# Altium PCB dv_spectrum_row.PcbDoc
Units mil, origin at the board's own origin, x right, y up, seen from the top; angles counter-clockwise.
Board outline 24840 x 787.4 mil, 2 copper layers (Top Layer, Bottom Layer); 43 components, 47 nets, 266 pads, 42 vias.
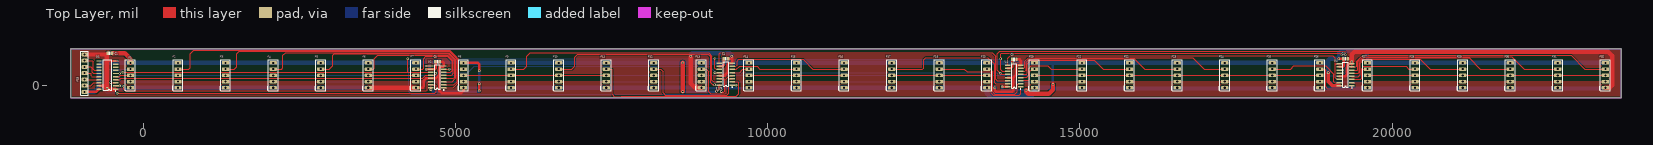
[diagram p0: Top Layer view]
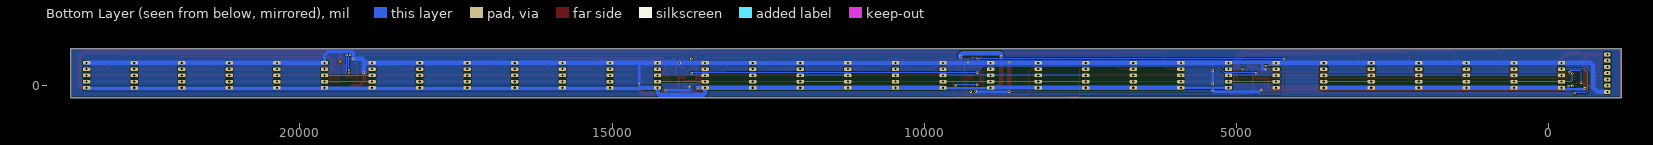
[diagram p1: Bottom Layer view, seen from below]

## Layer stack, top to bottom
Top Layer: signal copper 1.4
Dielectric: dielectric 12.6, FR-4, Dk 4.8
Bottom Layer: signal copper 1.4

## Board outline
-1165,-187.4 23675,-187.4 23675,600 -1165,600

## Design rules (kind name [scope] priority, off if disabled: settings)
Clearance Clearance_1 [IsRegion] p1: gap=20
Clearance [All] p2: gap=10
PolygonConnect [All] p1: connectstyle=Relief reliefconductorwidth=10 reliefentries=4 polygonreliefangle="90 Angle" airgapwidth=10
RoomDefinition dv_spectrum_row [InComponentClass('dv_spectrum_row')] p1: confinementstyle=ConfineIn formatcopy=TRUE lockcomponents=FALSE outline -1248.7,-955 4981.3,-955 4981.3,-135 -1248.7,-135
RoutingVias [All] p1: holewidth=19.68 width=39.37 viastyle="Through Hole" minholewidth=19.68 minwidth=39.37 maxholewidth=19.68 maxwidth=39.37
SolderMaskExpansion [All] p1: expansion=4
Width [All] p1: maxlimit=70 minlimit=10 preferedwidth=10
28 further rules are at their usual default settings.

## Classes and differential pairs
component class dv_spectrum_row: C1 C2 C3 C4 P1 P2 P3 P4 P5 P6 P7 P8 P9 P10 P11 P12 P13 P14 P15 P16 P17 P18 P19 P20 P21 P22 P23 P24 P25 P26 P27 P28 P29 P30 P31 P32 P33 U1 U2 U3

## Components (designator, comment, footprint, x,y, rotation, side; value= is the part's Value field where it differs from the comment)
C1 "0.1UF 50V" CAPC2012X135N 9335,435 r180 top
C2 "0.1UF 50V" CAPC2012X135N -535,526.3 r0 top
C3 "0.1UF 50V" CAPC2012X135N 13950,425 r0 top
C4 "0.1UF 50V" CAPC2012X135N 4715,390 r0 top
C4 "0.1UF 50V" CAPC2012X135N 19255,435 r0 top
P1 "Header 5" HDR1X5 -205,-30 r90 top
P2 "Header 5" HDR1X5 557,-30 r90 top
P3 "Header 5" HDR1X5 1319,-30 r90 top
P4 "Header 5" HDR1X5 2081,-30 r90 top
P5 "Header 5" HDR1X5 2843.01,-30 r90 top
P6 "Header 5" HDR1X5 3605.01,-30 r90 top
P7 "Header 5" HDR1X5 4367.01,-30 r90 top
P8 "Header 5" HDR1X5 5129.01,-30 r90 top
P9 "Header 5" HDR1X5 5891.01,-30 r90 top
P10 "Header 5" HDR1X5 6653.01,-30 r90 top
P11 "Header 5" HDR1X5 7415.01,-30 r90 top
P12 "Header 5" HDR1X5 8177.02,-30 r90 top
P13 "Header 5" HDR1X5 8939.02,-30 r90 top
P14 "Header 5" HDR1X5 9701.02,-30 r90 top
P15 "Header 5" HDR1X5 10463.02,-30 r90 top
P16 "Header 5" HDR1X5 11225.02,-30 r90 top
P17 "Header 5" HDR1X5 11987.02,-30 r90 top
P18 "Header 5" HDR1X5 12749.03,-30 r90 top
P19 "Header 5" HDR1X5 13511.03,-30 r90 top
P20 "Header 5" HDR1X5 14273.03,-30 r90 top
P21 "Header 5" HDR1X5 15035.03,-30 r90 top
P22 "Header 5" HDR1X5 15797.03,-30 r90 top
P23 "Header 5" HDR1X5 16559.03,-30 r90 top
P24 "Header 5" HDR1X5 17321.03,-30 r90 top
P25 "Header 5" HDR1X5 18083.04,-30 r90 top
P26 "Header 5" HDR1X5 18845.04,-30 r90 top
P27 "Header 5" HDR1X5 19607.04,-30 r90 top
P28 "Header 5" HDR1X5 20369.04,-30 r90 top
P29 "Header 5" HDR1X5 21131.04,-30 r90 top
P30 "Header 5" HDR1X5 21893.04,-30 r90 top
P31 "Header 5" HDR1X5 22655.05,-30 r90 top
P32 "Header 5" HDR1X5 23417.05,-30 r90 top
P33 "Header 7" HDR1X7 -938.7,-95 r90 top
U1 "74HC245/SO" SO20-150MIL -443.7,-50 r90 top
U2 "74595" SO16-150mil 4710,145 r90 top
U3 "74595" SO16-150mil 9330,190 r90 top
U4 "74595" SO16-150mil 13950,160 r90 top
U4 "74595" SO16-150mil 19255,180 r90 top

## Footprints (in the part's own frame and the unit in brackets; to place one, negate y for a bottom-side part, rotate by r counter-clockwise, add the part's x,y. Pads: shape width x height; smd on the part's side, far side on the other; paste and mask are expansions set on the pad)
CAPC2012X135N [mm] "Chip Capacitor, Body 2.0x1.2mm, EIA 0805, IPC Medium Density"
  round 0.254 on Mech15: 0(0,0)
  rrect25% 1x1.4 smd: 1(-0.9,0) 2(0.9,0)
  Top Layer pour cut-out: -0.675,0.7 -0.475,0.9 0.475,0.9 0.675,0.7 0.675,-0.7 0.475,-0.9 -0.475,-0.9 -0.675,-0.7
  silkscreen extent -0.15,-0.65 0.15,0.65, body extent -1.1,-0.72 1.1,0.73, height 1.34
HDR1X5 [mm] "Connector; Header; 5 Position"
  rrect50% 1.5x3 hole 0.9: 1(0,0) 2(2.54,0) 3(5.08,0) 4(7.62,0) 5(10.16,0)
  silkscreen extent -1.27,-1.98 11.43,2.22
HDR1X7 [mil] "Connector; Header; 7 Position"
  rrect50% 62.99x100 hole 32: 1(0,0) 2(100,0) 3(200,0) 4(300,0) 5(400,0) 6(500,0) 7(600,0)
  silkscreen extent -50,-62 650,63
SO16-150mil [mm] "Small Outline; 16 Leads; Body Width 3.9 mm; Pitch 1.27 mm"
  rect 0.6x2.2 smd: 1(-4.445,-2.6) 2(-3.175,-2.6) 3(-1.905,-2.6) 4(-0.635,-2.6) 5(0.635,-2.6) 6(1.905,-2.6) 7(3.175,-2.6) 8(4.445,-2.6) 9(4.445,2.6) 10(3.175,2.6) 11(1.905,2.6) 12(0.635,2.6) 13(-0.635,2.6) 14(-1.905,2.6) 15(-3.175,2.6) 16(-4.445,2.6)
  silkscreen extent -5.42,-2.72 5,1.1, body extent -4.95,-3.1 4.95,3.1, height 1.7
SO20-150MIL [mm] "Small Outline; 16 Leads; Body Width 3.9 mm; Pitch 1.27 mm"
  rect 0.6x2.2 smd: 1(0,0) 2(1.27,0) 3(2.54,0) 4(3.81,0) 5(5.08,0) 6(6.35,0) 7(7.62,0) 8(8.89,0) 9(10.16,0) 10(11.43,0) 11(11.43,6.724) 12(10.16,6.724) 13(8.89,6.724) 14(7.62,6.724) 15(6.35,6.724) 16(5.08,6.724) 17(3.81,6.724) 18(2.54,6.724) 19(1.27,6.724) 20(0,6.724)
  silkscreen extent -0.97,-0.12 11.97,5.08, body extent -0.75,-0.5 12.15,7.3, height 2

## Part data
C1 C2 C3 C4 C4: library part CC0805ZRY5V9BB104, "CAP CER 0.1UF 50V Y5V 0805"
P1 P2 P3 P4 P5 P6 P7 P8 P9 P10 P11 P12 P13 P14 P15 P16 P17 P18 P19 P20 P21 P22 P23 P24 P25 P26 P27 P28 P29 P30 P31 P32: "Header, 5-Pin"
P33: "Header, 7-Pin"
U1: library part 74HC245/SO_1
U2 U3 U4 U4: "8-Bit Serial-Input/Serial or Prallel-Output Shift Register with Latched 3-State Outputs"

## Via types
v1: diameter 39.37, hole 19.68, Top Layer to Bottom Layer, 42 vias

## Nets (pads, with @x,y where several pads share a name; then routed paths per layer and width w, separated by ;. In a path a pad name is that pad's centre, name@x,y a point inside that pad or via, vN(x,y) a via of type N, cw(c..) or ccw(c..) an arc to the next point about the centre after c; other vN are vias at no path point)
CK: P1.3 P2.3 P3.3 P4.3 P5.3 P6.3 P7.3 P8.3 P9.3 P10.3 P11.3 P12.3 P13.3 P14.3 P15.3 P16.3 P17.3 P18.3 P19.3 P20.3 P21.3 P22.3 P23.3 P24.3 P25.3 P26.3 P27.3 P28.3 P29.3 P30.3 P31.3 P32.3 U1.5 | length 23873.2
  Top Layer w10: U1.5 -380.95,150 -360.95,170 P1.3 ; P6.3 P7.3 ; P8.3 P9.3 P10.3 P11.3 ; P14.3 P15.3 P16.3 ; P17.3 P18.3 P19.3 ; P20.3 P21.3 P22.3 P23.3 P24.3 P25.3 P26.3 ; P27.3 P28.3 P29.3 P30.3 P31.3 P32.3
  Bottom Layer w10: P1.3 P2.3 P3.3 P4.3 P5.3 P6.3 ; P7.3 P8.3 ; P11.3 P12.3 P13.3 P14.3 ; P16.3 P17.3 ; P19.3 P20.3 ; P26.3 18850.04,165 19602.04,165 P27.3
D0: P1.4 U2.15 | length 6259.1
  Top Layer w10: v1(-420,-115) 4670,-115 4690,-95 4690,5 4675,20 U2.15
  Bottom Layer w10: v1@-420,-110 -595,-110 -625,-80 -625,210 -565,270 P1.4
D1: P2.4 U2.1 | length 5458.7
  Top Layer w10: P2.4 730,270 750,290 750,520 805,575 4906.57,575 5045,436.57 5045,50 4965,-30 U2.1
D2: P3.4 U2.2 | length 4591.2
  Top Layer w10: P3.4 1460,270 1500,310 1500,520 1535,555 4898.28,555 5025,428.28 5025,70 4975,20 U2.2
D3: P4.4 U2.3 | length 3706
  Top Layer w10: P4.4 2215,270 2235,290 2235,490 2280,535 4890,535 5005,420 5005,130 4945,70 U2.3
D4: P5.4 U2.4 | length 2836.6
  Top Layer w10: P5.4 2980,270 3035,325 3035,490 3060,515 4881.72,515 4985,411.72 4985,138.28 4966.72,120 U2.4
D5: P6.4 U2.5 | length 1950.4
  Top Layer w10: P6.4 3685,270 3700,285 3700,440 3755,495 4873.43,495 4965,403.43 4965,200 4945,180 4935,170 U2.5
D6: P7.4 U2.6 | length 1079.9
  Top Layer w10: P7.4 4475,270 4490,285 4490,440 4525,475 4865.15,475 4945,395.15 4945,245 4920,220 U2.6
D7: P8.4 U2.7 | length 316.6
  Top Layer w10: U2.7 v1(4900,270)
  Bottom Layer w10: v1(4900,270) P8.4
D8: P9.4 U3.15 | length 3956.2
  Top Layer w10: P9.4 6095,270 6140,315 6140,475 6195,530 9055,530 9105,480 9105,95 9135,65 U3.15
D9: P10.4 U3.1 | length 3536
  Top Layer w10: P10.4 6865,270 6910,315 6910,460 6960,510 9046.72,510 9085,471.72 9085,55 9120,20 v1(9150,20) ; U3.1 v1(9495,15)
  Bottom Layer w10: v1(9150,20) v1@9495,20
D10: P11.4 U3.2 | length 2847.4
  Top Layer w10: P11.4 7505,270 7510,265 7510,-133.86 7545,-168.86 7660,-168.86 7663.86,-165 9500,-165 9540,-125 9540,50 9525,65 U3.2
D11: P12.4 U3.3 | length 1857.1
  Top Layer w10: P12.4 8285,270 8325,230 8325,-110 8360,-145 9345,-145 9374.06,-115.95 9374.06,94.05 9395,115 U3.3
D12: P13.4 U3.4 | length 1101.7
  Top Layer w10: P13.4 9015,270 9055,230 9055,-95 9085,-125 9325,-125 9334.06,-115.95 9334.06,113.28 9385.77,165 U3.4
D13: P14.4 U3.5 | length 291.4
  Top Layer w10: U3.5 9550,215 9605,270 P14.4
D14: P15.4 U3.6 | length 1070
  Top Layer w10: U3.6 9500,265 9550,315 9830,315 9875,270 P15.4
D15: P16.4 U3.7 | length 1940.5
  Top Layer w10: U3.7 9490,315 9510,335 9510,400 9535,425 10570,425 10725,270 P16.4
D16: P17.4 U4.15@13847.64,35 | length 2361.4
  Top Layer w10: P17.4 12480,270 12497.5,287.5 12497.5,417.5 12535,455 13527.17,455 13635,347.17 13635,50 13650,35 U4.15@13847.64,35
D17: P18.4 U4.1@14052.36,-15 | length 1789.6
  Top Layer w10: P18.4 13151.72,270 13196.24,225.47 13564.53,225.47 13585.08,204.92 13585.08,-120.08 13615,-150 14030,-150 14052.36,-127.64 U4.1@14052.36,-15
D18: P19.4 U4.2@14052.36,35 | length 990.7
  Top Layer w10: P19.4 13565,270 13605.08,229.92 13605.08,-95.08 13640,-130 13960,-130 13994.05,-95.95 13994.05,19.05 U4.2@14010,35
D19: P20.4 U4.3@14052.36,85 | length 358.4
  Top Layer w10: U4.3@14062.36,90 14180,90 14198.97,108.97 14198.97,233.97 14235,270 P20.4
D20: P21.4 U4.4@14052.36,135 | length 1136.5
  Top Layer w10: U4.4@14062.36,140 14150,140 14178.97,168.97 14178.97,278.97 14225,325 14485,325 14540,270 P21.4
D21: P22.4 U4.5@14052.36,185 | length 1979.8
  Top Layer w10: U4.5@14062.36,190 14148.97,190 14158.97,200 14158.97,357.09 14216.41,414.53 14235,414.53 ; 14235,415 15230,415 15375,270 P22.4
D22: P23.4 U4.6@14052.36,235 | length 2798.5
  Top Layer w10: U4.6@14052.36,235 14118.97,235 14138.97,255 14138.97,378.97 14195,435 15870,435 16040,265 16625,265
D23: P24.4 U4.7@14052.36,285 | length 3470.8
  Top Layer w10: U4.7@14052.36,285 14103.97,285 14118.97,300 14118.97,393.97 14180,455 16805,455 16990,270 P24.4
D24: P25.4 U4.15@19152.64,55 | length 1277.6
  Top Layer w10: P25.4 18375,270 18430,325 18936.72,325 19070,191.72 19070,70 19090,50 19137.64,50 U4.15@19152.64,50
D25: P26.4 U4.1@19357.36,5 | length 835.8
  Top Layer w10: P26.4 18920,270 18935,255 18935,-15 18965,-45 19340,-45 19357.36,-27.64 U4.1@19357.36,0
D26: P27.4 U4.2@19357.36,55 | length 447.1
  Top Layer w10: U4.2@19357.36,55 19520,55 19532.98,67.98 19532.98,252.98 19550,270 P27.4
D27: P28.4 U4.3@19357.36,105 | length 1208.9
  Top Layer w10: U4.3@19357.36,105 19497.98,105 19512.98,120 19512.98,277.09 19550.42,314.53 20225.47,314.53 20270,270 P28.4
D28: P29.4 U4.4@19357.36,155 | length 2066.1
  Top Layer w10: U4.4@19357.36,150 19462.98,150 19492.98,180 19492.98,367.98 19555,430 20450,430 20610,270 P29.4
D29: P30.4 U4.5@19357.36,205 | length 2803.3
  Top Layer w10: U4.5@19357.36,205 19457.98,205 19472.98,220 19472.98,376.27 19546.72,450 21235,450 21415,270 P30.4
D30: P31.4 U4.6@19357.36,255 | length 3540.8
  Top Layer w10: U4.6@19357.36,255 19445,255 19452.98,262.98 19452.98,384.55 19538.43,470 21920,470 22120,270 P31.4
D31: P32.4 U4.7@19357.36,305 | length 4288
  Top Layer w10: U4.7@19342.36,300 U4.7@19357.36,300 ; U4.7@19357.36,305 19422.98,305 19432.98,315 19432.98,392.84 19530.15,490 22870,490 23090,270 P32.4
DATA: U1.2 U2.14 | length 5270
  Top Layer w10: U1.2 v1(-380,0) v1@-365,0 ; v1(-310,-5) -310,-55 -285,-80 4535,-80 4545,-70 4545,65 4550,70 U2.14
  Bottom Layer w10: v1(-380,0) -315,0 v1(-310,-5)
GND: C1.1 C2.1 C3.2 C4.2 P1.1 P2.1 P3.1 P4.1 P5.1 P6.1 P7.1 P8.1 P9.1 P10.1 P11.1 P12.1 P13.1 P14.1 P15.1 P16.1 P17.1 P18.1 P19.1 P20.1 P21.1 P22.1 P23.1 P24.1 P25.1 P26.1 P27.1 P28.1 P29.1 P30.1 P31.1 P32.1 P33.7 U1.1 U1.10 U1.19 U2.8 U2.13 U3.8 U3.13 U4.8 U4.13 | length 35508.6
  Top Layer w40: U1.19 -639.67,0 ; -545,400 U1.10 ; P7.1 4470,-30 4495,-5 4495,90.5 4524.5,120 U2.13 4685,120 4730.94,165.95 ; C4.2@4750.43,390 4795,390 4810,375 4810,335 ; U2.8 4804.17,311.81 4756.63,311.81 4739.06,294.24 4739.06,-74.05 4780,-115 5090,-115 5129.01,-75.99 P8.1 ; v1@8770,460 v1(8770,475) ; U3.13 9310,165 9359.06,214.05 9359.06,339.24 9384.82,365 U3.8 9432.36,412.64 ; C1.1 9410,435 9432.36,412.64 ; v1(9425,475) 9432.36,467.64 9432.36,412.64 ; v1(13640.08,-30) 13640.08,-75 13655.08,-90 13915,-90 13935,-70 13935,135 U4.13@13847.64,135 ; 13947.5,147.5 13979.05,179.05 13979.05,309.24 14004.82,335 14052.36,335 14052.36,407.64 14035,425 C3.2 ; U4.13@19152.64,155 19245,155 19284.06,194.05 19284.06,329.24 19309.82,355 19357.36,355 U4.8@19357.36,361.81 ; C4.2@19290.43,435 19350,435 19357.36,427.64
  Top Layer w70: P33.7 -591.73,505 -584.69,512.05 -584.69,410 ; -639.67,0 -620,0 v1@-584.69,-35.31 ; -581.5,406.81 -584.69,410 ; U1.1@-453.29,-56.81 -563.19,-56.81 v1(-580,-40) v1@-584.69,-35.31 ; P6.1 P7.1 ; v1@8770,460 8770,40 8840,-30 P13.1 ; U4.8@19357.36,361.81 19357.36,427.64 19357.36,507.36 19400,550 23460,550 23525,485 23525,10 23485,-30 P32.1 ; v1@-584.69,-35.31 -584.69,410
  Bottom Layer w40: v1(-580,-40) -565.31,-54.69 -229.69,-54.69 P1.1 ; P8.1 P9.1 ; v1(8770,475) 8770,500 ; P13.1 P13.1@8943.7,-30 ; P13.1@8943.7,-34.69 9696.33,-34.69 P14.1
  Bottom Layer w60: P12.1 8177.17,-29.84 8938.86,-29.84 P13.1
  Bottom Layer w70: P1.1 P2.1 P3.1 P4.1 P5.1 P6.1 ; P9.1 P10.1 P11.1 P12.1 ; P12.1@8177.17,-29.84 8182.49,-24.53 P13.1@8939.02,-24.53 ; 8770,500 8795,525 9390,525 9425,490 v1(9425,475) ; P14.1 P15.1 P16.1 P17.1 P18.1 P19.1 ; v1(13640.08,-30) P19.1 ; P32.1 23407.05,-40 14543.08,-40 14533.08,-30 P20.1 14273.03,-106.97 14241.14,-138.86 13533.86,-138.86 13511.03,-116.03 P19.1
  other v1: 19355,385
LAT: U1.4 U2.12 U3.12 U4.12 | length 20879.1
  Top Layer w10: U1.4 -380,100 -360,120 4475,120 4525,170 U2.12 4665,170 4685,190 v1(4685,205) ; v1(9155,215) U3.12 ; U4.12@13847.64,185 13745,185 v1(13725,205) 13675,255 13675,515 13715,555 19240,555 19250,545 v1(19250,500) ; U4.12@19152.64,205 v1(19215,205)
  Bottom Layer w10: v1(4685,205) 4695,215 5200,215 5299.53,314.53 9065.47,314.53 9155,225 v1(9155,215) 13715,215 v1(13725,205) ; v1(19215,205) 19240,205 19250,215 v1(19250,500)
LE: P1.2 P2.2 P3.2 P4.2 P5.2 P6.2 P7.2 P8.2 P9.2 P10.2 P11.2 P12.2 P13.2 P14.2 P15.2 P16.2 P17.2 P18.2 P19.2 P20.2 P21.2 P22.2 P23.2 P24.2 P25.2 P26.2 P27.2 P28.2 P29.2 P30.2 P31.2 P32.2 U1.6 | length 23976.1
  Top Layer w10: U1.6 v1(-380,200) ; P2.2 P3.2 P4.2 P5.2 ; P6.2 P7.2 ; P8.2 P9.2 P10.2 P11.2 ; P14.2 P15.2 P16.2 ; P17.2 P18.2 P19.2 ; P20.2 P21.2 P22.2 P23.2 P24.2 P25.2 P26.2 ; P27.2 P28.2 P29.2 P30.2 P31.2 P32.2
  Bottom Layer w10: v1(-380,200) -380,95 -355,70 P1.2 P2.2 ; P5.2 P6.2 ; P7.2 P8.2 ; P11.2 P12.2 P13.2 P14.2 ; P16.2 P17.2 ; P19.2 P20.2 ; P26.2 P27.2
NetP33_2: P33.2 U1.18 | length 248.9
  Top Layer w10: P33.2 -840,5 -795,50 U1.18
NetP33_3: P33.3 U1.17 | length 230.3
  Top Layer w10: P33.3 P33.3@-933.7,105 ; P33.3@-933.7,100 U1.17
NetP33_4: P33.4 U1.16 | length 276.5
  Top Layer w10: P33.4 -840,205 -835,200 -835,160 -825,150 U1.16
NetP33_5: P33.5 U1.15 | length 311.8
  Top Layer w10: P33.5 -840,305 -820,285 -820,220 -800,200 U1.15
NetP33_6: P33.6 U1.14 | length 367.7
  Top Layer w10: P33.6 -815,405 -800,390 -800,265 -785,250 U1.14
NetU2_9: U2.9 U3.14 | length 6138.8
  Top Layer w10: v1@4525,320 U2.9 ; U3.14 9305,115 9314.06,105.95 9314.06,-80.95 9295,-100 v1@9260,-100
  Bottom Layer w10: v1(4530,320) 4290,320 4255,285 4255,-90 4293.86,-128.86 5910,-128.86 9256.14,-128.86 9260,-125 v1@9260,-95
  other v1: 9260,-90
NetU3_9: U3.9 U4.14@13847.64,85 | length 5185.9
  Top Layer w10: U3.9 9227.64,517.64 9245,535 13600,535 13655,480 13655,105 13675,85 U4.14@13847.64,85
NetU4_9: U4.9 U4.14@19152.64,105 | length 5843.9
  Top Layer w10: U4.9@13847.64,335 13847.64,447.64 13885,485 19050,485 19090,445 19090,340 ; U4.14@19152.64,105 19115,105 19090,130 19090,340 ; U4.9@19152.64,355 19105,355 19090,340
SCK: U1.3 U2.11 U3.11 U4.11 | length 21453.8
  Top Layer w10: v1(-520,55) -515,50 U1.3 ; v1(-325,220) 4235,220 ; v1(4235,435) 4235,220 ; U2.11 4235,220 ; v1@9155,425 9155,285 9175,265 U3.11 ; U4.11@13847.64,235 13755,235 13730,260 v1(13730,435) 13730,510 13745,525 19170,525 v1(19195,500)
  Bottom Layer w10: v1(-520,55) -520,230 -510,240 -345,240 v1(-325,220) ; v1(4235,435) 4240,440 v1(9155,440) 9160,445 9260,445 9280,425 13720,425 v1(13730,435) ; v1(19195,500) 19215,480 v1(19215,255)
VCC: C1.2 C2.2 C3.1 C4.1 P1.5 P2.5 P3.5 P4.5 P5.5 P6.5 P7.5 P8.5 P9.5 P10.5 P11.5 P12.5 P13.5 P14.5 P15.5 P16.5 P17.5 P18.5 P19.5 P20.5 P21.5 P22.5 P23.5 P24.5 P25.5 P26.5 P27.5 P28.5 P29.5 P30.5 P31.5 P32.5 P33.1 U1.20 U2.10 U2.16 U3.10 U3.16 U4.10 U4.16 | length 31339.3
  Top Layer w40: P33.1 -755,-95 -710,-50 U1.20 ; C2.2 C2.2@-490.43,526.3 ; v1(4530,270.31) 4665.31,270.31 4680.94,285.95 4680.94,388.62 C4.1@4679.57,390 ; v1(4607.64,-57.36) U2.16 ; P8.5 5360,370 5380,350 v1(5380,245) ; v1(5380,-80) v1(5380,35) ; v1(9180,-85) 9227.64,-37.36 U3.16 ; U3.10 9275.18,315 9300.94,340.76 9300.94,433.62 C1.2 ; v1(13755,-15) U4.16@13847.64,-15 ; U4.10@13847.64,285 13895.18,285 13920.94,310.76 v1(13920.94,365) 13920.94,418.62 C3.1 ; v1@14570,20 v1(14570,25) ; v1(19145,435) 19219.57,435 19225.94,428.62 19225.94,323.11 19207.84,305 U4.10@19152.64,305
  Top Layer w60: v1(18980,210) 18980,70 19046.81,3.19 U4.16@19160,3.19
  Top Layer w70: C2.2@-490.43,526.3 -296.3,526.3 -205,435 P1.5 ; v1@8640,-89.06 v1(8640,370) ; v1(14140,-70) 14140,-90 14175,-125 14505,-125 14570,-60 v1@14570,20
  Bottom Layer w40: v1(4530,270.31) 4570.31,270.31 4585,285 4585,370 ; v1(4607.64,-57.36) 4639.8,-89.53 5370.47,-89.53 v1(5380,-80) ; v1(5380,35) v1@5380,240 ; v1@8640.47,-89.84 8914.01,-89.84 8914.17,-90 9175,-90 v1(9180,-85) ; v1(13755,-15) 13755,-55 13770,-70 v1(14140,-70) ; v1(14570,25) 14570,370
  Bottom Layer w50: v1(18980,210) v1@18980,215 ; v1(19145,435) 19140.31,439.69 19140.31,525.31 19169.69,554.69 19545.31,554.69 19607.04,492.96 P27.5
  Bottom Layer w60: 4465,370 4474.69,379.69 P8.5@5119.33,379.69
  Bottom Layer w70: P33.1 -785,-95 -715,-25 -715,330 -675,370 P1.5 P2.5 P3.5 P4.5 P5.5 P6.5 P7.5 4465,370 ; P8.5 P9.5 P10.5 P11.5 P12.5 v1(8640,370) P13.5 9305,370 P14.5 P15.5 P16.5 P17.5 P18.5 P19.5 P20.5 14570,370 P21.5 P22.5 P23.5 P24.5 P25.5 P26.5 18975,370 18980,365 ; v1@18980,215 18980,365 ; v1(19145,435) 19005,435 18980,410 18980,365 ; P27.5 P28.5 P29.5 P30.5 P31.5 P32.5
  other v1: 8640.47,-89.53 9300.94,370
pads on no net: C1.0 C2.0 C3.0 C4.0 U1.7 U1.8 U1.9 U1.11 U1.12 U1.13
copper on no net:
  other v1: 670,-3480

## Polygon pours and split planes (outlines as drawn)
VCC on Bottom Layer "Top Layer-No Net" (solid, remove dead copper, pour order 6): -1165,-187.4 23675,-187.4 23675,600 -1165,600
GND on Top Layer "Top Layer-No Net1" (solid, remove dead copper, pour order 9): -1165,-187.4 23675,-187.4 23675,600 -1165,600

## Keep-outs
Keep-Out Layer:
  the board outline again, w7.09